# Altium PCB PCB1.PcbDoc
Units mm, origin at the board's own origin, x right, y up, seen from the top; angles counter-clockwise.
Board outline 70 x 70 mm, 6 copper layers (Top Layer, L2, L3 (GND), L4 (GND), L5, Bottom Layer), stack 2.025 mm thick; 68 components, 65 nets, 192 pads, 0 vias.
Unrouted connection lines stored in the file: 48.
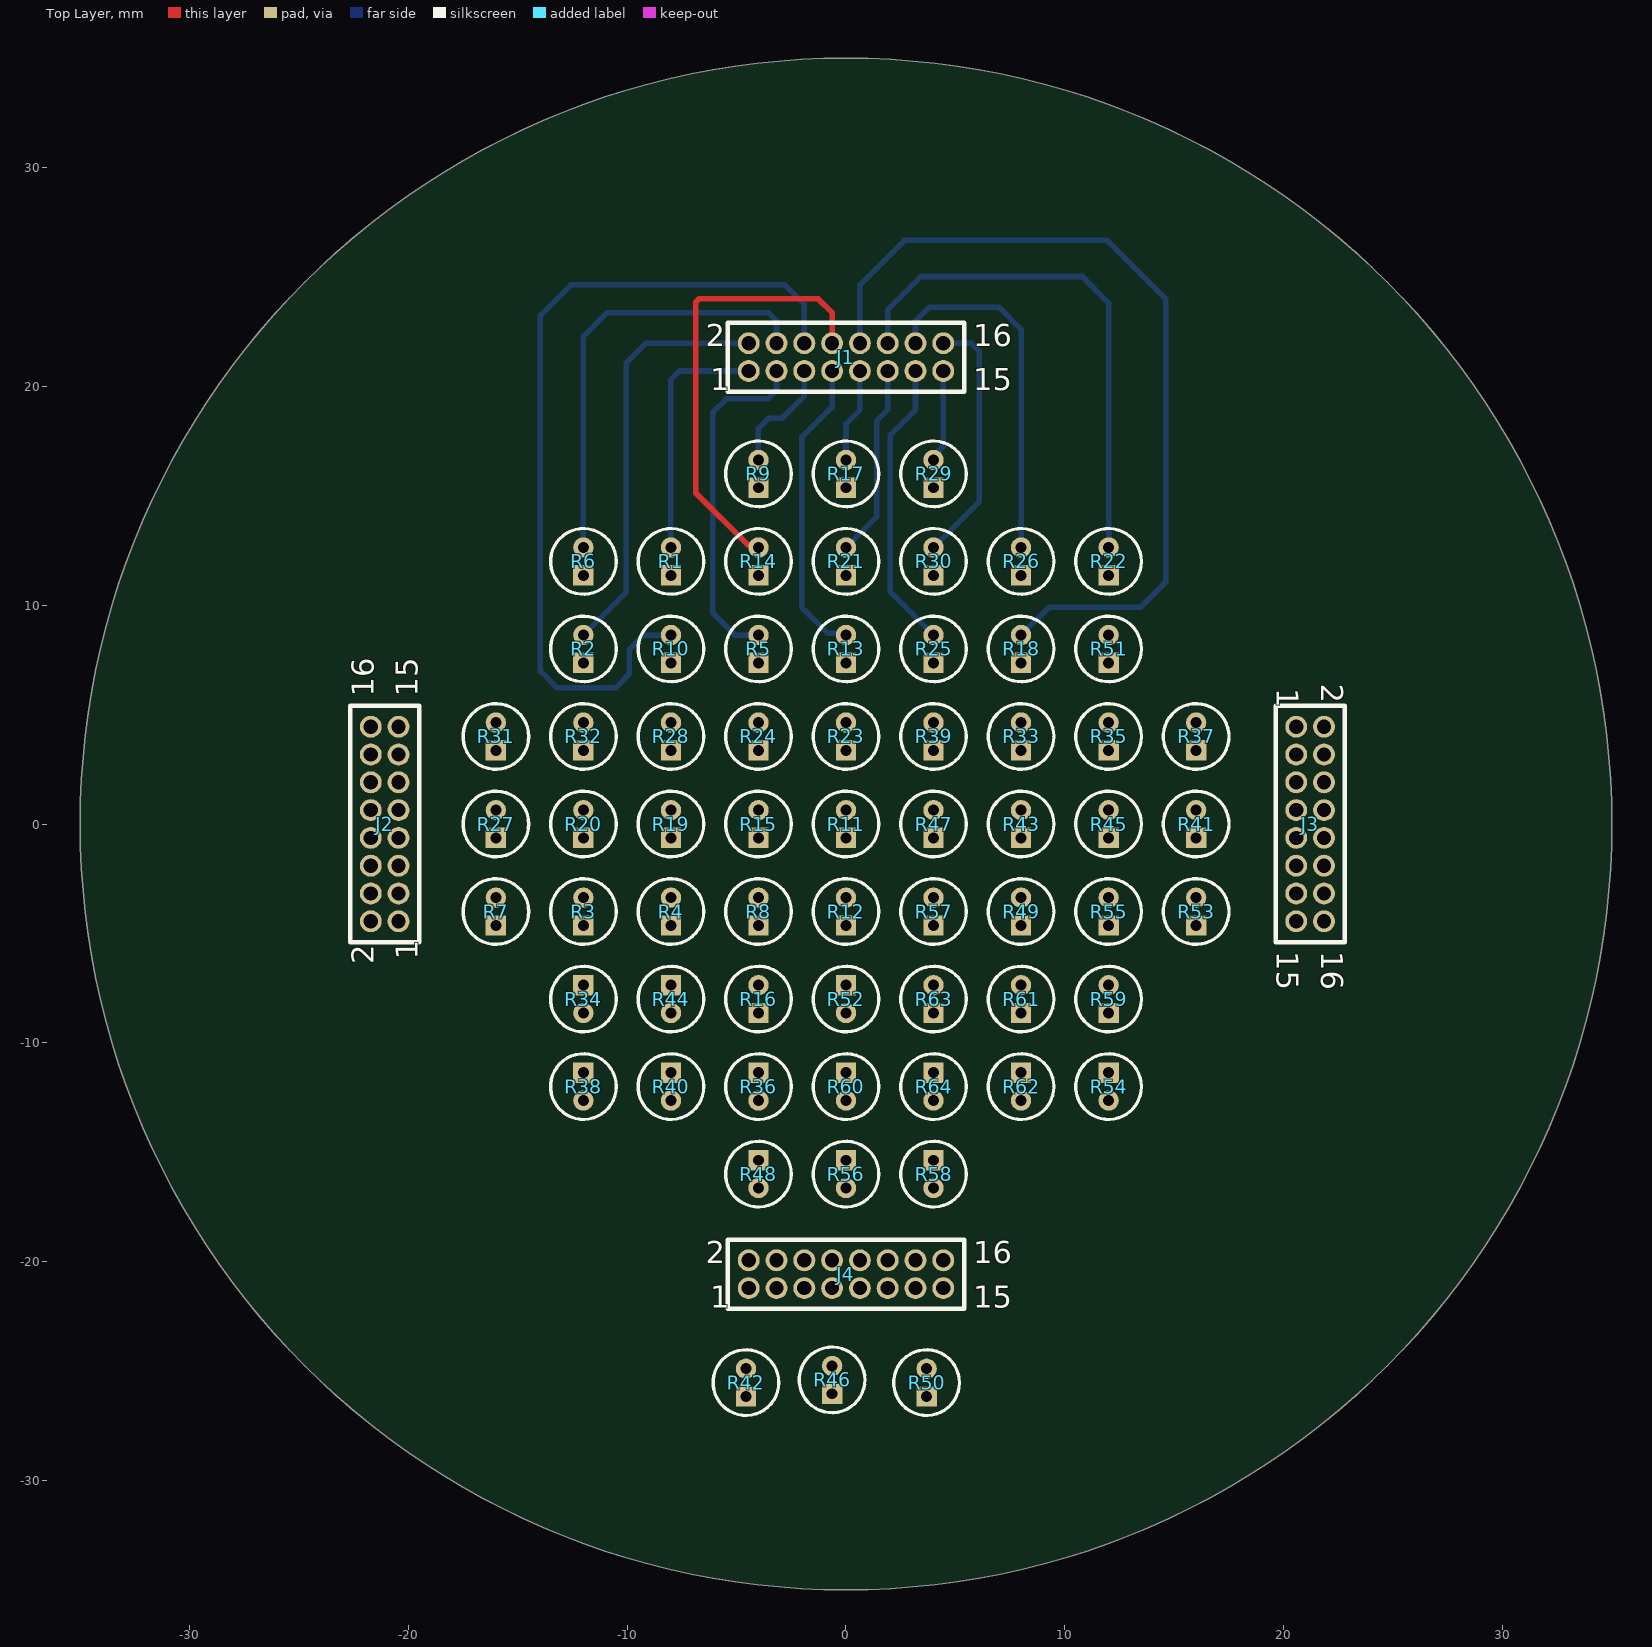
[diagram p0: Top Layer view]
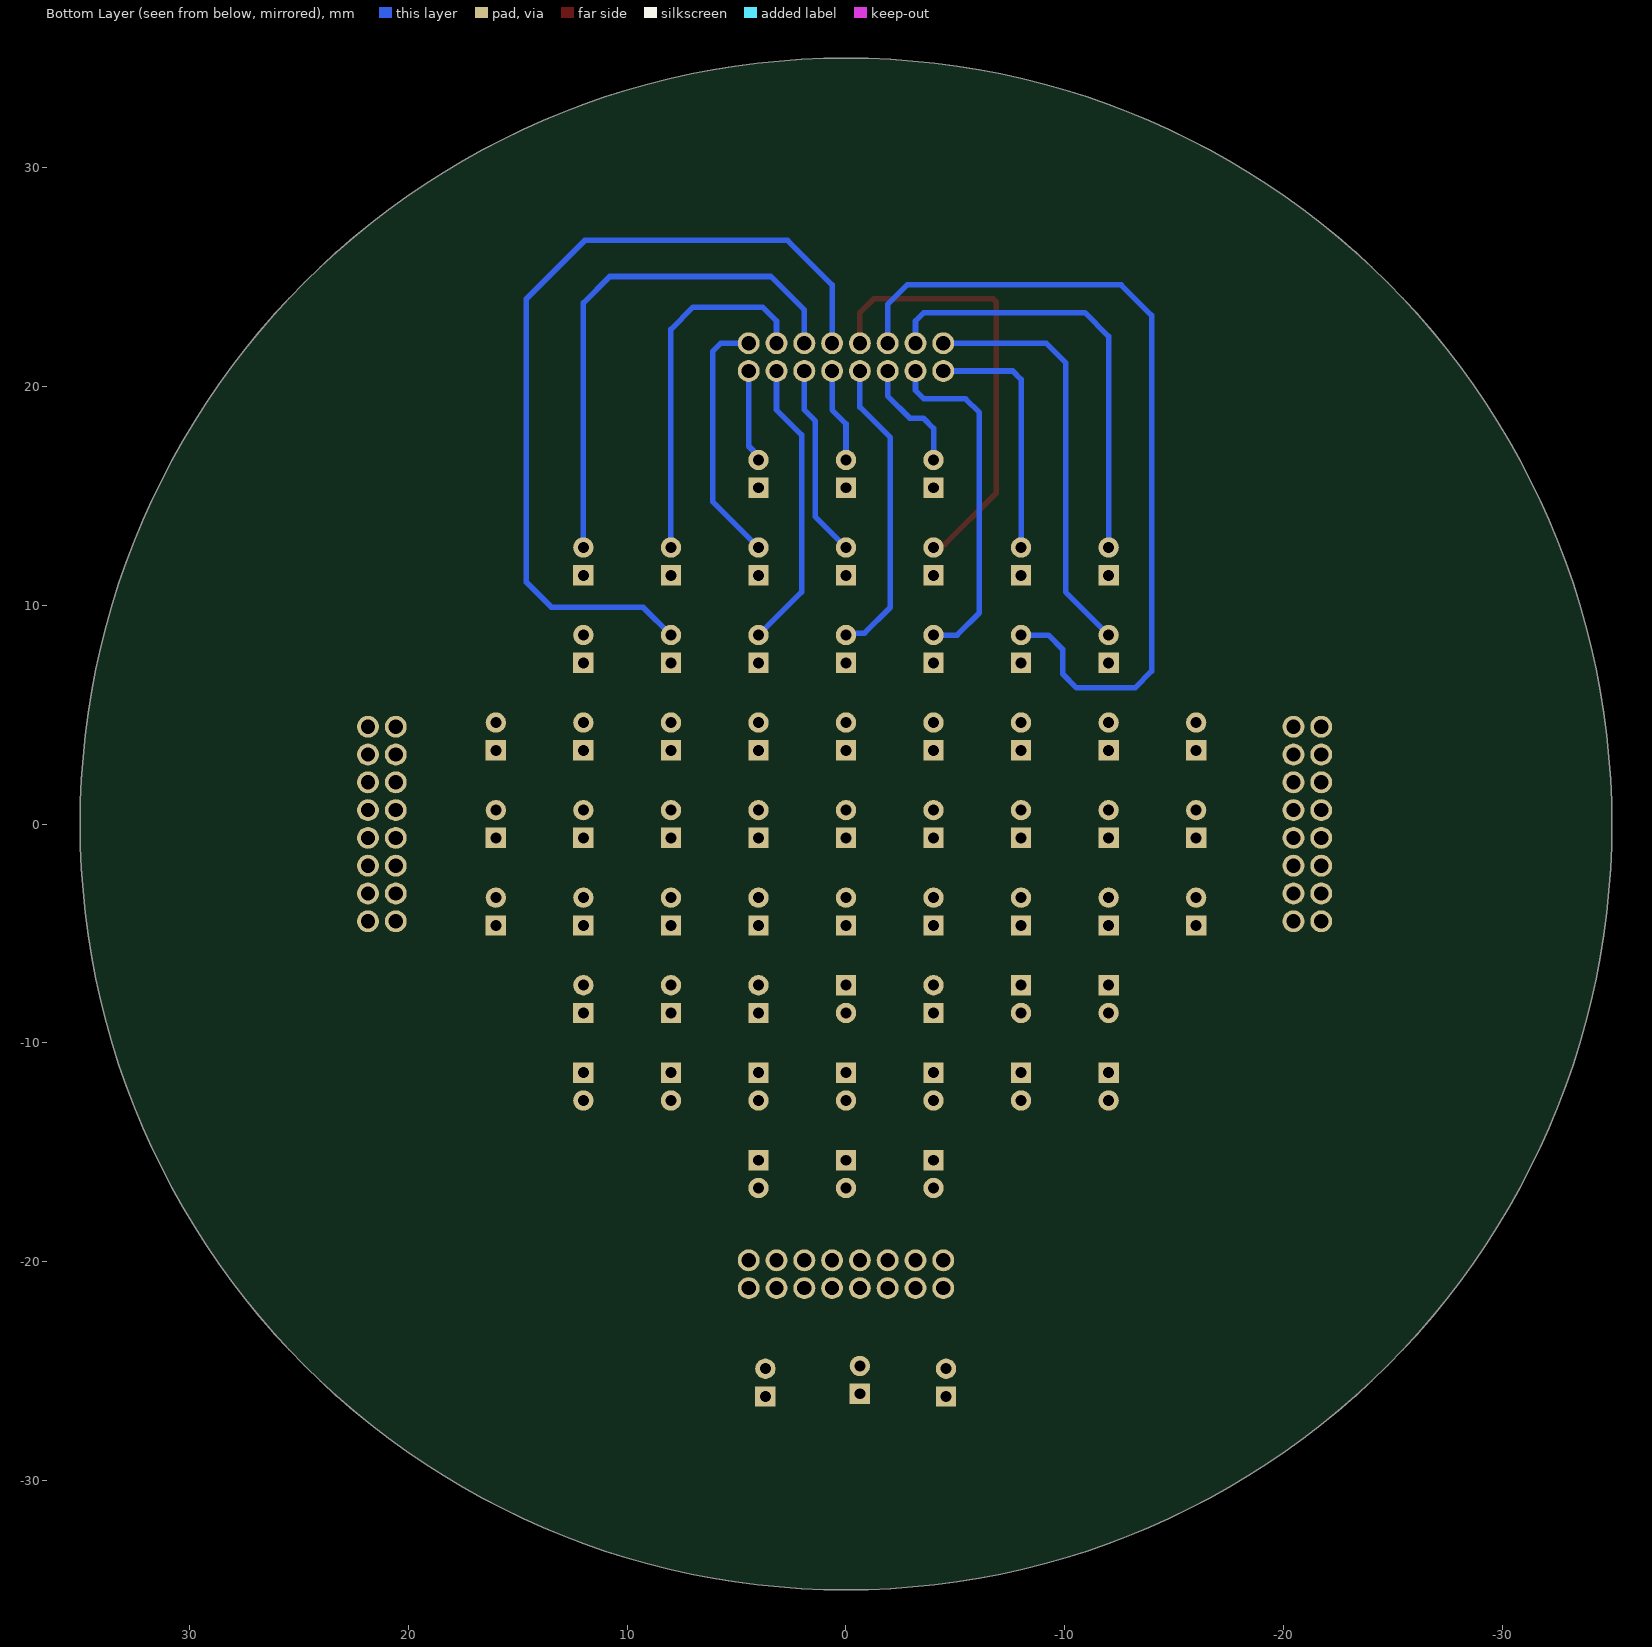
[diagram p1: Bottom Layer view, seen from below]
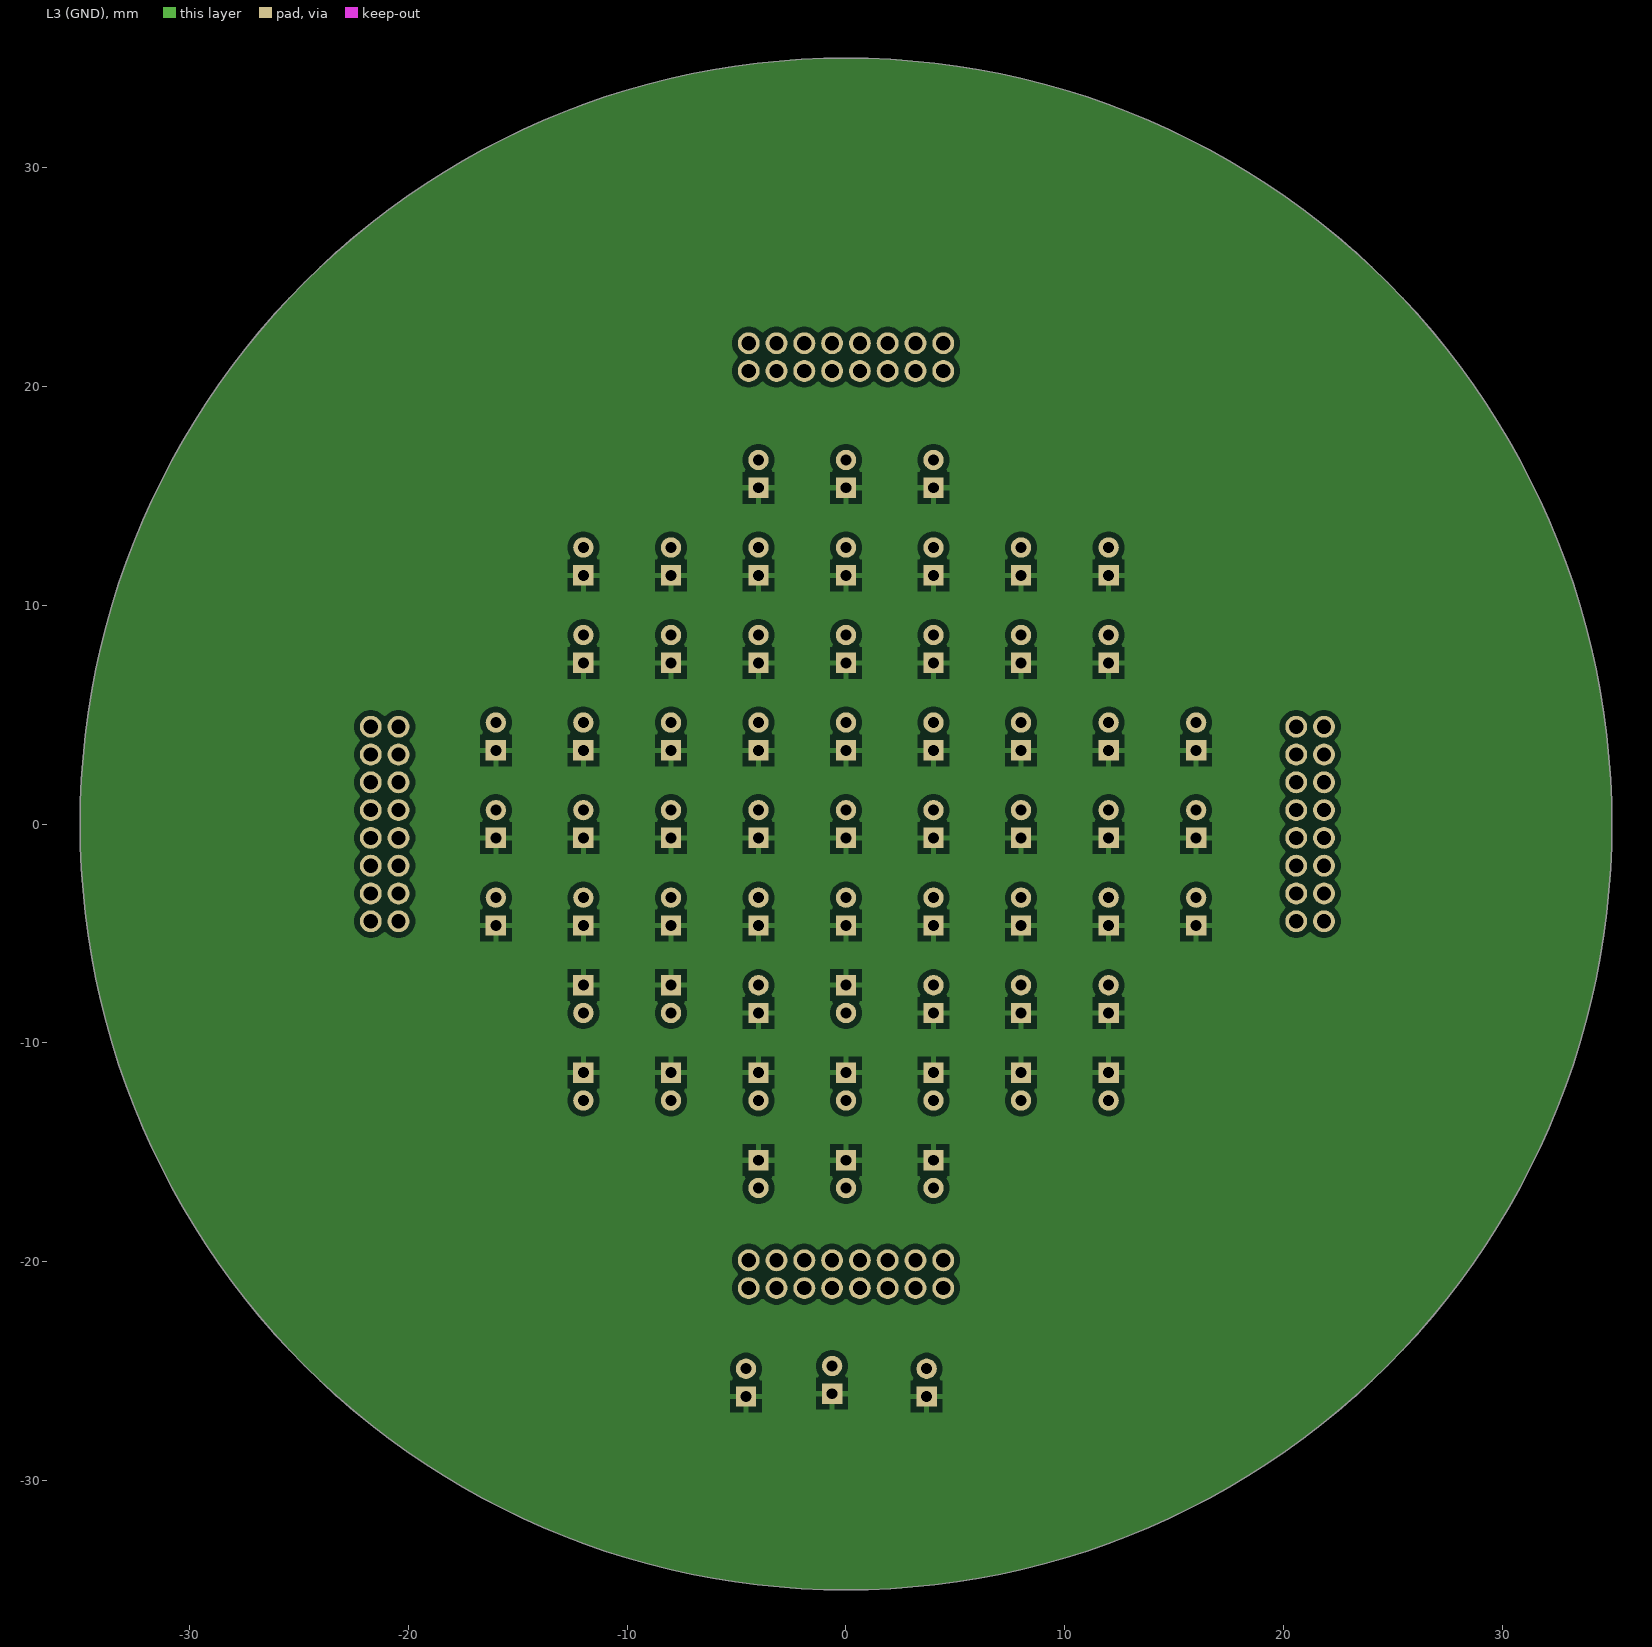
[diagram p2: L3 (GND)]

## Layer stack, top to bottom
Top Solder: solder mask 0.0254, SM-001, Dk 4
Top Layer: signal copper 0.035
Dielectric 4: prepreg 0.09, PP-011, Dk 4.1
L2: signal copper 0.035
Dielectric 6: prepreg 0.09, PP-011, Dk 4.1
L3 (GND): signal copper 0.035
Dielectric 2: prepreg 0.09, PP-011, Dk 4.1
Dielectric 1: core 1.275, Core-042, Dk 4.6
Dielectric 3: prepreg 0.09, PP-011, Dk 4.1
L4 (GND): signal copper 0.035
Dielectric 7: prepreg 0.09, PP-011, Dk 4.1
L5: signal copper 0.035
Dielectric 5: prepreg 0.09, PP-011, Dk 4.1
Bottom Layer: signal copper 0.035
Bottom Solder: solder mask 0.0254, SM-001, Dk 4

## Board outline
0,-35 cw(c0,0) -35,0 cw(c0,0) 0,35 cw(c0,0) 35,0 cw(c0,0)

## Design rules (kind name [scope] priority, off if disabled: settings)
Clearance [All] p1: gap=0.254 ignorepadtopadclearanceinfootprint=FALSE except(0: Arc-Hole Track-Hole SMDPad-Hole THPad-Hole Via-Hole Fill-Hole Poly-Hole Region-Hole Text-Hole)
PolygonConnect [All] p1: connectstyle=Relief reliefconductorwidth=0.254 reliefentries=4 polygonreliefangle="90 Angle" airgapwidth=0.254
RoomDefinition Matrix [InComponentClass('Matrix')] p1: confinementstyle=ConfineIn formatcopy=TRUE lockcomponents=FALSE outline -74.422,-47.371 297.815,-47.371 297.815,-40.513 -74.422,-40.513
RoutingVias [All] p1: holewidth=0.711 width=1.27 viastyle="Through Hole" minholewidth=0.711 minwidth=1.27 maxholewidth=0.711 maxwidth=1.27
SolderMaskExpansion [All] p1: expansion=0.102 istentingtop=FALSE
Width [All] p1: maxlimit=0.254 minlimit=0.254 preferedwidth=0.254
30 further rules are at their usual default settings.

## Components (designator, comment, footprint, x,y, rotation, side; value= is the part's Value field where it differs from the comment)
J1 "62201621821" 62201621821 0,21.336 r0 top
J2 "62201621821" 62201621821 -21.082,0 r90 top
J3 "62201621821" 62201621821 21.209,0 r270 top
J4 "62201621821" 62201621821 0,-20.574 r0 top
R1 "NTCLE413E2103F524A" NTCLE413E2103F524A -8,12 r90 top
R2 "NTCLE413E2103F524A" NTCLE413E2103F524A -12,8 r90 top
R3 "NTCLE413E2103F524A" NTCLE413E2103F524A -12,-4 r90 top
R4 "NTCLE413E2103F524A" NTCLE413E2103F524A -8,-4 r90 top
R5 "NTCLE413E2103F524A" NTCLE413E2103F524A -4,8 r90 top
R6 "NTCLE413E2103F524A" NTCLE413E2103F524A -12,12 r90 top
R7 "NTCLE413E2103F524A" NTCLE413E2103F524A -16,-4 r90 top
R8 "NTCLE413E2103F524A" NTCLE413E2103F524A -4,-4 r90 top
R9 "NTCLE413E2103F524A" NTCLE413E2103F524A -4,16 r90 top
R10 "NTCLE413E2103F524A" NTCLE413E2103F524A -8,8 r90 top
R11 "NTCLE413E2103F524A" NTCLE413E2103F524A 0,0 r90 top
R12 "NTCLE413E2103F524A" NTCLE413E2103F524A 0,-4 r90 top
R13 "NTCLE413E2103F524A" NTCLE413E2103F524A 0,8 r90 top
R14 "NTCLE413E2103F524A" NTCLE413E2103F524A -4,12 r90 top
R15 "NTCLE413E2103F524A" NTCLE413E2103F524A -4,0 r90 top
R16 "NTCLE413E2103F524A" NTCLE413E2103F524A -4,-8 r90 top
R17 "NTCLE413E2103F524A" NTCLE413E2103F524A 0,16 r90 top
R18 "NTCLE413E2103F524A" NTCLE413E2103F524A 8,8 r90 top
R19 "NTCLE413E2103F524A" NTCLE413E2103F524A -8,0 r90 top
R20 "NTCLE413E2103F524A" NTCLE413E2103F524A -12,0 r90 top
R21 "NTCLE413E2103F524A" NTCLE413E2103F524A 0,12 r90 top
R22 "NTCLE413E2103F524A" NTCLE413E2103F524A 12,12 r90 top
R23 "NTCLE413E2103F524A" NTCLE413E2103F524A 0,4 r90 top
R24 "NTCLE413E2103F524A" NTCLE413E2103F524A -4,4 r90 top
R25 "NTCLE413E2103F524A" NTCLE413E2103F524A 4,8 r90 top
R26 "NTCLE413E2103F524A" NTCLE413E2103F524A 8,12 r90 top
R27 "NTCLE413E2103F524A" NTCLE413E2103F524A -16,0 r90 top
R28 "NTCLE413E2103F524A" NTCLE413E2103F524A -8,4 r90 top
R29 "NTCLE413E2103F524A" NTCLE413E2103F524A 4,16 r90 top
R30 "NTCLE413E2103F524A" NTCLE413E2103F524A 4,12 r90 top
R31 "NTCLE413E2103F524A" NTCLE413E2103F524A -16,4 r90 top
R32 "NTCLE413E2103F524A" NTCLE413E2103F524A -12,4 r90 top
R33 "NTCLE413E2103F524A" NTCLE413E2103F524A 8,4 r90 top
R34 "NTCLE413E2103F524A" NTCLE413E2103F524A -12,-8 r270 top
R35 "NTCLE413E2103F524A" NTCLE413E2103F524A 12,4 r90 top
R36 "NTCLE413E2103F524A" NTCLE413E2103F524A -4,-12 r270 top
R37 "NTCLE413E2103F524A" NTCLE413E2103F524A 16,4 r90 top
R38 "NTCLE413E2103F524A" NTCLE413E2103F524A -12,-12 r270 top
R39 "NTCLE413E2103F524A" NTCLE413E2103F524A 4,4 r90 top
R40 "NTCLE413E2103F524A" NTCLE413E2103F524A -8,-12 r270 top
R41 "NTCLE413E2103F524A" NTCLE413E2103F524A 16,0 r90 top
R42 "NTCLE413E2103F524A" NTCLE413E2103F524A -4.572,-25.527 r90 top
R43 "NTCLE413E2103F524A" NTCLE413E2103F524A 8,0 r90 top
R44 "NTCLE413E2103F524A" NTCLE413E2103F524A -8,-8 r270 top
R45 "NTCLE413E2103F524A" NTCLE413E2103F524A 12,0 r90 top
R46 "NTCLE413E2103F524A" NTCLE413E2103F524A -0.635,-25.4 r90 top
R47 "NTCLE413E2103F524A" NTCLE413E2103F524A 4,0 r90 top
R48 "NTCLE413E2103F524A" NTCLE413E2103F524A -4,-16 r270 top
R49 "NTCLE413E2103F524A" NTCLE413E2103F524A 8,-4 r90 top
R50 "NTCLE413E2103F524A" NTCLE413E2103F524A 3.683,-25.527 r90 top
R51 "NTCLE413E2103F524A" NTCLE413E2103F524A 12,8 r90 top
R52 "NTCLE413E2103F524A" NTCLE413E2103F524A 0,-8 r270 top
R53 "NTCLE413E2103F524A" NTCLE413E2103F524A 16,-4 r90 top
R54 "NTCLE413E2103F524A" NTCLE413E2103F524A 12,-12 r270 top
R55 "NTCLE413E2103F524A" NTCLE413E2103F524A 12,-4 r90 top
R56 "NTCLE413E2103F524A" NTCLE413E2103F524A 0,-16 r270 top
R57 "NTCLE413E2103F524A" NTCLE413E2103F524A 4,-4 r90 top
R58 "NTCLE413E2103F524A" NTCLE413E2103F524A 4,-16 r270 top
R59 "NTCLE413E2103F524A" NTCLE413E2103F524A 12,-8 r90 top
R60 "NTCLE413E2103F524A" NTCLE413E2103F524A 0,-12 r270 top
R61 "NTCLE413E2103F524A" NTCLE413E2103F524A 8,-8 r90 top
R62 "NTCLE413E2103F524A" NTCLE413E2103F524A 8,-12 r270 top
R63 "NTCLE413E2103F524A" NTCLE413E2103F524A 4,-8 r90 top
R64 "NTCLE413E2103F524A" NTCLE413E2103F524A 4,-12 r270 top

## Footprints (in the part's own frame and the unit in brackets; to place one, negate y for a bottom-side part, rotate by r counter-clockwise, add the part's x,y. Pads: shape width x height; smd on the part's side, far side on the other; paste and mask are expansions set on the pad)
62201621821 [mm] "Socket Header, Pitch 1.27 mm, THT, Vertical, dual row, 16p"
  round 1 hole 0.65: 1(-4.445,-0.635) 2(-4.445,0.635) 3(-3.175,-0.635) 4(-3.175,0.635) 5(-1.905,-0.635) 6(-1.905,0.635) 7(-0.635,-0.635) 8(-0.635,0.635) 9(0.635,-0.635) 10(0.635,0.635) 11(1.905,-0.635) 12(1.905,0.635) 13(3.175,-0.635) 14(3.175,0.635) 15(4.445,-0.635) 16(4.445,0.635)
  silkscreen extent -5.41,-1.58 5.41,1.58, body extent -5.28,-1.5 5.28,1.5, height 4.55
NTCLE413E2103F524A [mm]
  rect 0.93x0.93 hole 0.5 paste-1000 mask+0: 1(-0.635,0)
  round 0.93 hole 0.5 paste-1000 mask+0: 2(0.635,0)
  silkscreen extent -1.5,-1.5 1.5,1.5, body extent -1.48,-1.5 1.48,1.5, height 2

## Part data
J1 J2 J3 J4: library part CMP-002-00076-1, "THT Vertical Socket Header WR-PHD, Pitch 1.27 mm, Dual Row, 16 pins", RoHS Compliant=Yes
R1 R2 R3 R4 R5 R6 R7 R8 R9 R10 R11 R12 R13 R14 R15 R16 R17 R18 R19 R20 R21 R22 R23 R24 R25 R26 R27 R28 R29 R30 R31 R32 R33 R34 R35 R36 R37 R38 R39 R40 R41 R42 R43 R44 R45 R46 R47 R48 R49 R50 R51 R52 R53 R54 R55 R56 R57 R58 R59 R60 R61 R62 R63 R64: library part CMP-009-00185-17, "NTC epoxy PVC AWG30 105°C 10K 1% 3435K 1% L52 A", RoHS Compliant=Yes

## Nets (pads, with @x,y where several pads share a name; then routed paths per layer and width w, separated by ;. In a path a pad name is that pad's centre, name@x,y a point inside that pad or via, vN(x,y) a via of type N, cw(c..) or ccw(c..) an arc to the next point about the centre after c; other vN are vias at no path point)
GND: R1.1 R2.1 R3.1 R4.1 R5.1 R6.1 R7.1 R8.1 R9.1 R10.1 R11.1 R12.1 R13.1 R14.1 R15.1 R16.1 R17.1 R18.1 R19.1 R20.1 R21.1 R22.1 R23.1 R24.1 R25.1 R26.1 R27.1 R28.1 R29.1 R30.1 R31.1 R32.1 R33.1 R34.1 R35.1 R36.1 R37.1 R38.1 R39.1 R40.1 R41.1 R42.1 R43.1 R44.1 R45.1 R46.1 R47.1 R48.1 R49.1 R50.1 R51.1 R52.1 R53.1 R54.1 R55.1 R56.1 R57.1 R58.1 R59.1 R60.1 R61.1 R62.1 R63.1 R64.1
NetJ1_1: J1.1 R1.2 | length 11.4
  Bottom Layer w0.254: R1.2 -8.001,12.636 -8.001,20.32 -7.62,20.701 J1.1
NetJ1_2: J1.2 R2.2 | length 19.2
  Bottom Layer w0.254: R2.2 -10.033,10.602 -10.033,21.082 -9.144,21.971 J1.2
NetJ1_3: J1.3 R5.2 | length 15.9
  Bottom Layer w0.254: R5.2 -5.079,8.635 -6.096,9.652 -6.096,18.796 -5.461,19.431 -3.556,19.431 -3.175,19.812 J1.3
NetJ1_4: J1.4 R6.2 | length 20.1
  Bottom Layer w0.254: R6.2 -12,22.287 -10.919,23.368 -3.556,23.368 -3.175,22.987 J1.4
NetJ1_5: J1.5 R9.2 | length 5.3
  Bottom Layer w0.254: R9.2 -4,18.076 -3.534,18.542 -2.921,18.542 -1.905,19.558 J1.5
NetJ1_6: J1.6 R10.2 | length 39
  Bottom Layer w0.254: R10.2 -9.25,8.635 -9.906,7.979 -9.906,6.858 -10.541,6.223 -13.208,6.223 -13.97,6.985 -13.97,23.241 -12.573,24.638 -2.794,24.638 -1.905,23.749 J1.6
NetJ1_7: J1.7 R13.2 | length 13.9
  Bottom Layer w0.254: J1.7 -0.635,19.05 -2.032,17.653 -2.032,9.906 -0.846,8.72 -0.085,8.72 R13.2
NetJ1_8: J1.8 R14.2 | length 20.6
  Top Layer w0.254: R14.2 -4.129,12.764 -4.509,12.764 -6.858,15.113 -6.858,23.854 -6.709,24.003 -1.27,24.003 -0.635,23.368 J1.8
NetJ1_9: J1.9 R17.2 | length 4.3
  Bottom Layer w0.254: R17.2 0,18.288 0.635,18.923 J1.9
NetJ1_10: J1.10 R18.2 | length 39.1
  Bottom Layer w0.254: J1.10 0.635,24.638 2.667,26.67 11.938,26.67 14.605,24.003 14.605,11.049 13.462,9.906 9.271,9.906 R18.2
NetJ1_11: J1.11 R21.2 | length 8.9
  Bottom Layer w0.254: R21.2 1.397,14.032 1.397,18.415 1.905,18.923 J1.11
NetJ1_12: J1.12 R22.2 | length 23.9
  Bottom Layer w0.254: J1.12 1.905,23.495 3.429,25.019 10.795,25.019 12,23.814 R22.2
NetJ1_13: J1.13 R25.2 | length 13.4
  Bottom Layer w0.254: J1.13 3.175,18.923 2.032,17.78 2.032,10.603 R25.2
NetJ1_14: J1.14 R26.2 | length 16.5
  Bottom Layer w0.254: J1.14 3.175,22.987 3.81,23.622 6.985,23.622 8,22.607 R26.2
NetJ1_15: J1.15 R29.2 | length 4.3
  Bottom Layer w0.254: R29.2 4,16.818 4.445,17.263 J1.15
NetJ1_16: J1.16 R30.2 | length 11.6
  Bottom Layer w0.254: R30.2 6.096,14.731 6.096,21.59 5.715,21.971 J1.16
NetJ2_1: J2.1 R3.2
NetJ2_2: J2.2 R4.2
NetJ2_3: J2.3 R7.2
NetJ2_4: J2.4 R8.2
NetJ2_5: J2.5 R11.2
NetJ2_6: J2.6 R12.2
NetJ2_7: J2.7 R15.2
NetJ2_8: J2.8 R16.2
NetJ2_9: J2.9 R19.2
NetJ2_10: J2.10 R20.2
NetJ2_11: J2.11 R23.2
NetJ2_12: J2.12 R24.2
NetJ2_13: J2.13 R27.2
NetJ2_14: J2.14 R28.2
NetJ2_15: J2.15 R31.2
NetJ2_16: J2.16 R32.2
NetJ3_1: J3.1 R33.2
NetJ3_2: J3.2 R35.2
NetJ3_3: J3.3 R37.2
NetJ3_4: J3.4 R39.2
NetJ3_5: J3.5 R41.2
NetJ3_6: J3.6 R43.2
NetJ3_7: J3.7 R45.2
NetJ3_8: J3.8 R47.2
NetJ3_9: J3.9 R49.2
NetJ3_10: J3.10 R51.2
NetJ3_11: J3.11 R53.2
NetJ3_12: J3.12 R55.2
NetJ3_13: J3.13 R57.2
NetJ3_14: J3.14 R59.2
NetJ3_15: J3.15 R61.2
NetJ3_16: J3.16 R63.2
NetJ4_1: J4.1 R34.2
NetJ4_2: J4.2 R36.2
NetJ4_3: J4.3 R38.2
NetJ4_4: J4.4 R40.2
NetJ4_5: J4.5 R42.2
NetJ4_6: J4.6 R44.2
NetJ4_7: J4.7 R46.2
NetJ4_8: J4.8 R48.2
NetJ4_9: J4.9 R50.2
NetJ4_10: J4.10 R52.2
NetJ4_11: J4.11 R54.2
NetJ4_12: J4.12 R56.2
NetJ4_13: J4.13 R58.2
NetJ4_14: J4.14 R60.2
NetJ4_15: J4.15 R62.2
NetJ4_16: J4.16 R64.2

## Polygon pours and split planes (outlines as drawn)
GND on L3 (GND) "Top GND" (solid, remove dead copper, pour order 0): 0,-35 cw(c0,0) -35,0 cw(c0,0) 0,35 cw(c0,0) 35,0 cw(c0,0)

## Text inside footprints (layer, text, board x,y; h text height)
J1: Top Overlay "15" at 5.81,19.813 h1.02; Top Overlay "16" at 5.81,21.843 h1.02; Top Overlay "2" at -6.41,21.843 h1.02; Top Overlay "1" at -6.21,19.813 h1.02
J2: Top Overlay "15" at -19.559,5.81 h1.02 r90; Top Overlay "16" at -21.589,5.81 h1.02 r90; Top Overlay "2" at -21.589,-6.41 h1.02 r90; Top Overlay "1" at -19.559,-6.21 h1.02 r90
J3: Top Overlay "15" at 19.686,-5.81 h1.02 r270; Top Overlay "16" at 21.716,-5.81 h1.02 r270; Top Overlay "2" at 21.716,6.41 h1.02 r270; Top Overlay "1" at 19.686,6.21 h1.02 r270
J4: Top Overlay "15" at 5.81,-22.097 h1.02; Top Overlay "16" at 5.81,-20.067 h1.02; Top Overlay "2" at -6.41,-20.067 h1.02; Top Overlay "1" at -6.21,-22.097 h1.02